# Altium PCB RCJ22_sensors_board_2_copy.PcbDoc
Units mm, origin at the board's own origin, x right, y up, seen from the top; angles counter-clockwise.
Board outline 70 x 42 mm, 2 copper layers (Top Layer, Bottom Layer), stack 1.071 mm thick; 44 components, 26 nets, 147 pads, 56 vias.
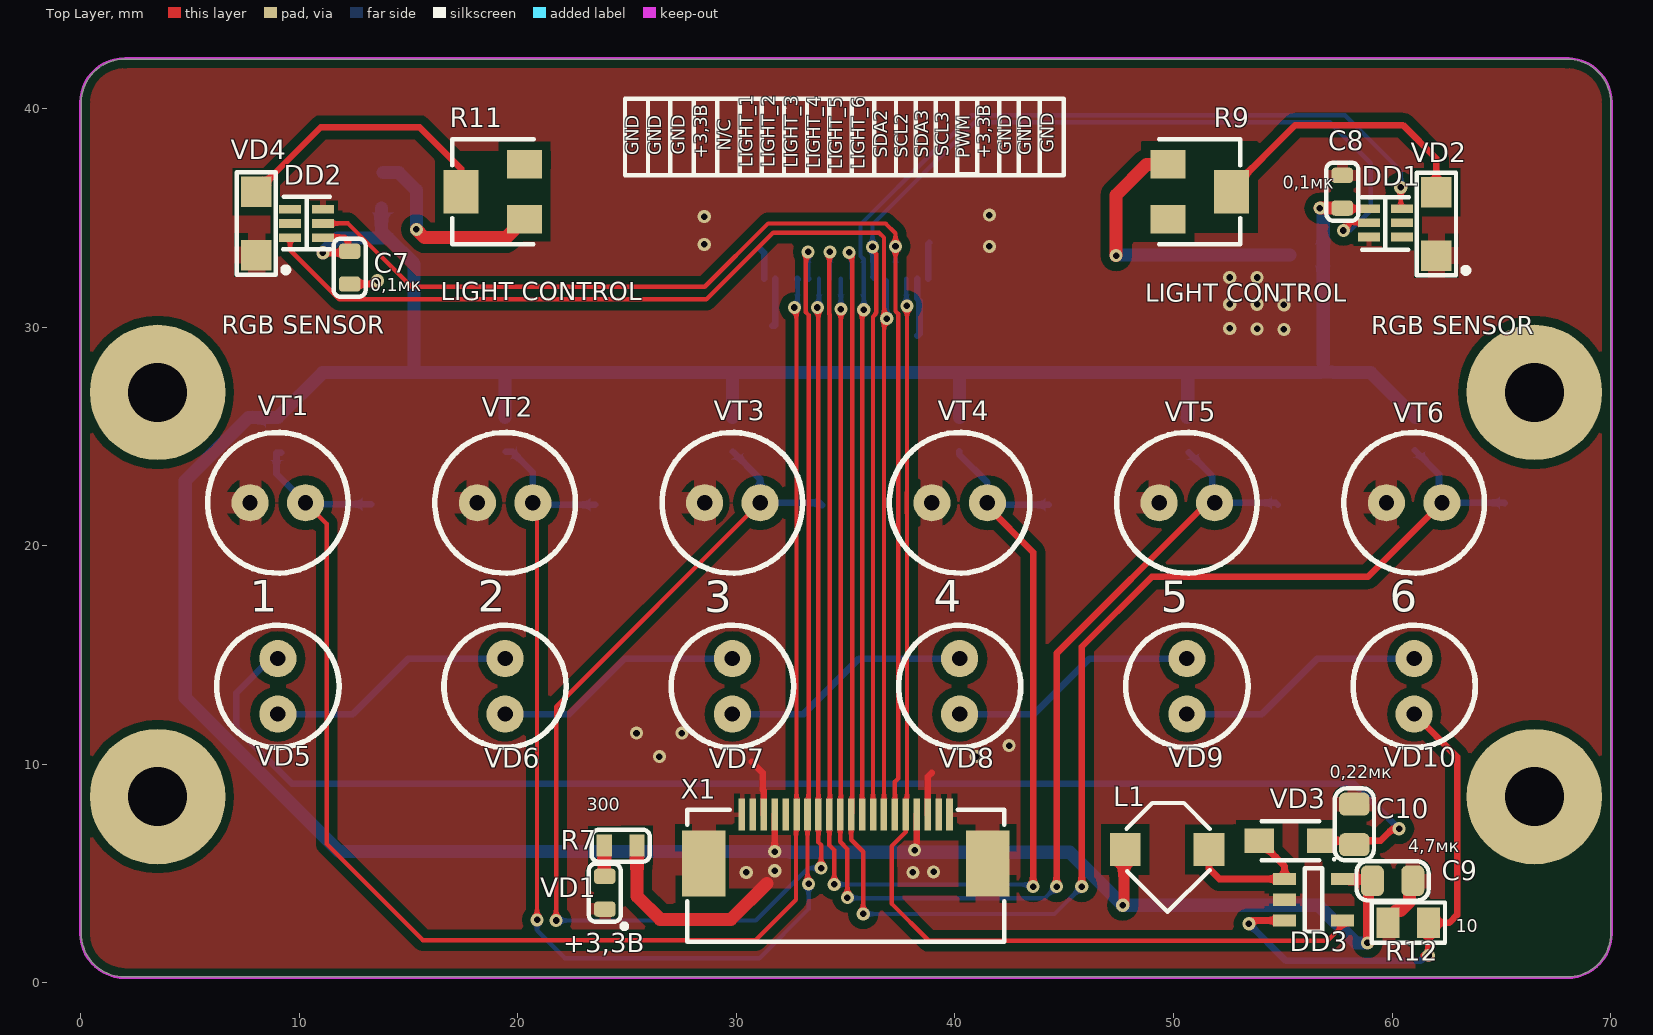
[diagram p0: Top Layer view]
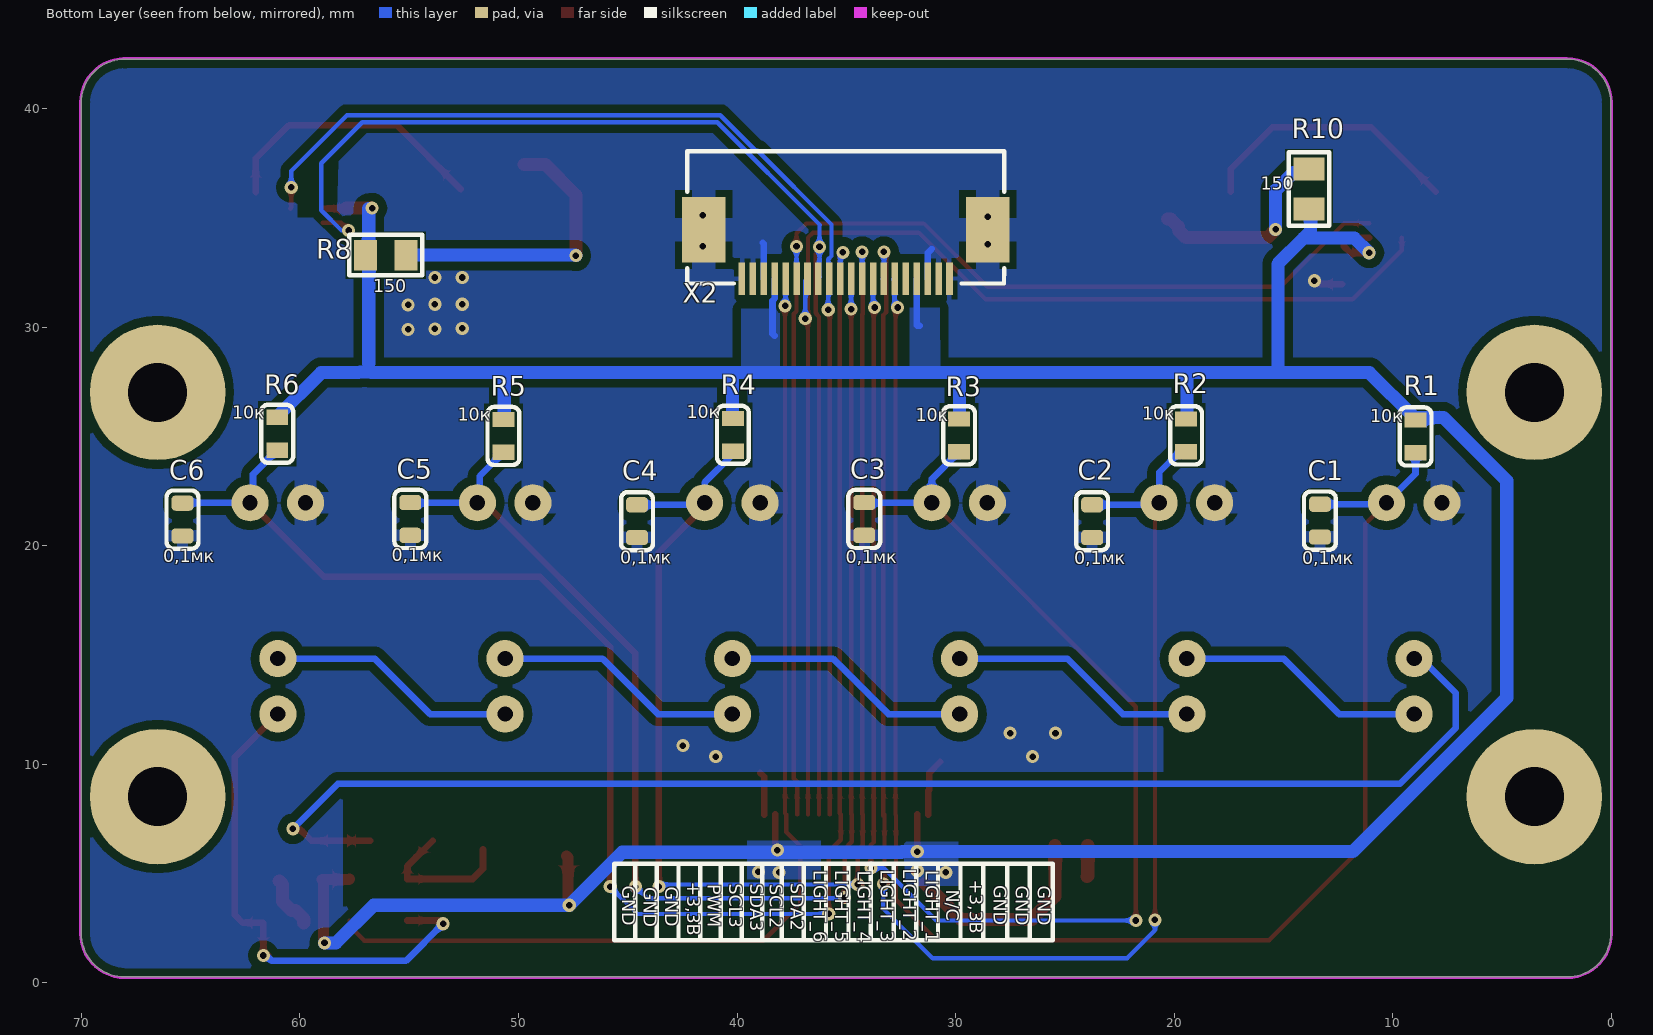
[diagram p1: Bottom Layer view, seen from below]
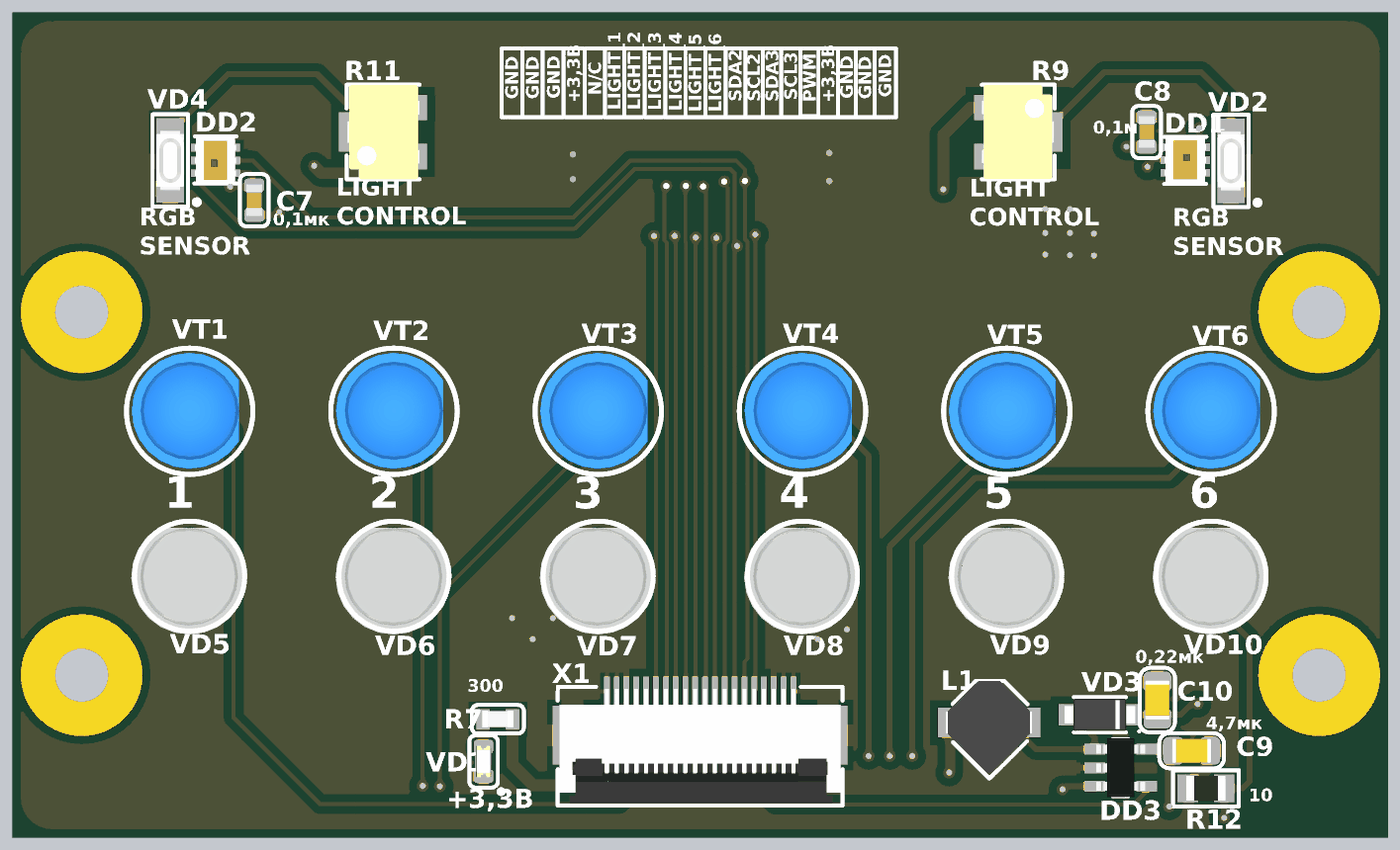
[diagram p2: 3D render of the assembled board from above, using the file's embedded part models]
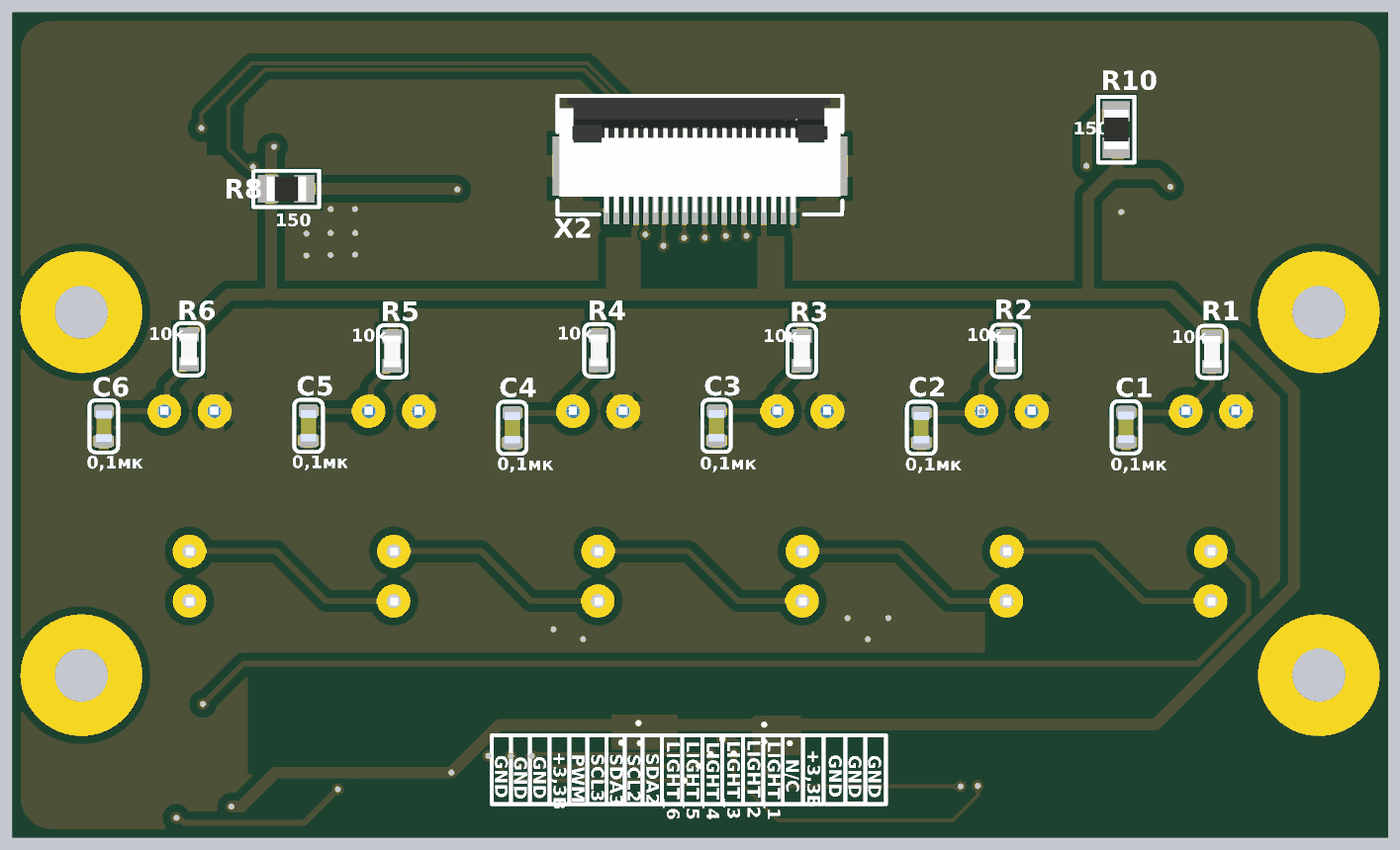
[diagram p3: 3D render of the assembled board from below, using the file's embedded part models]

## Layer stack, top to bottom
Top Solder: solder mask 0.0102, Solder Resist, Dk 3.5
Top Layer: signal copper 0.0356
Dielectric 1: dielectric 1, FR-4, Dk 4.8
Bottom Layer: signal copper 0.0356
Bottom Solder: solder mask 0.0102, Solder Resist, Dk 3.5

## Board outline
2.013,0.267 cw(c2.013,2.267) 0.013,2.267 0.013,40.267 0.012,40.267 cw(c2.013,40.267) 2.013,42.267 68.013,42.267 cw(c68.013,40.267) 70.013,40.267 70.013,2.267 cw(c68.013,2.267) 68.013,0.267

## Design rules (kind name [scope] priority, off if disabled: settings)
Clearance Clearance_GND_Poly [InNet('GND') AND InPolygon] p1: gap=0.4 ignorepadtopadclearanceinfootprint=FALSE
Clearance Clearance_2 [All] p2: gap=0.125 ignorepadtopadclearanceinfootprint=FALSE
Clearance Clearance_1 [IsPadHoleValid] p3: gap=0.2 ignorepadtopadclearanceinfootprint=FALSE
Clearance Clearance_Edge_Mid [((OnLayer('Signal Layer 1') OR OnLayer('Signal Layer 2')OR OnLayer('Signal Layer 3')OR OnLayer('Signal Layer 4'))) vs (OnLayer('Keep-Out Layer'))] p4: gap=0.25 ignorepadtopadclearanceinfootprint=FALSE
Clearance Clearance_Edge [All vs (OnLayer('Keep-Out Layer'))] p5: gap=0.25 ignorepadtopadclearanceinfootprint=FALSE
Clearance Via [IsVia vs IsVia] p6: gap=0.2 ignorepadtopadclearanceinfootprint=FALSE
Clearance Clearance_Poly_top [InPolygon AND (OnLayer('Top Layer') OR OnLayer('Bottom Layer'))] p7: gap=0.2 ignorepadtopadclearanceinfootprint=FALSE
Clearance Clearance_Poly_Mid [InPolygon AND (OnLayer('Signal Layer 1') OR OnLayer('Signal Layer 2') OR OnLayer('Signal Layer 3') OR OnLayer('Signal Layer 4'))] p8: gap=0.3 ignorepadtopadclearanceinfootprint=FALSE except(0.2: Via-Fill Via-Poly Via-Region)
ComponentClearance [All] p1: gap=0 collisioncheckmode=3 verticalgap=0 showdistances=FALSE
DiffPairsRouting [All] p1: maxlimit=0.254 minlimit=0.1 mostfreqgap=0.2 toplayer_minwidth=0.1 toplayer_maxwidth=0.381 toplayer_prefwidth=0.1 bottomlayer_minwidth=0.1 bottomlayer_maxwidth=0.381 bottomlayer_prefwidth=0.1 maxuncoupledlength=12.7
Height [All] p1: minheight=0 maxheight=30 prefheight=0
HoleSize [All] p1: absolutevalues=TRUE maxlimit=10 minlimit=0.2 maxpercent=80.000 minpercent=20.000
HoleToHoleClearance [All] p1: gap=0.2 allowstackedmicrovias=TRUE
MatchedLengths MatchedLengths_CSI2 [InDifferentialPairClass('MIPI_TX')] p1: tolerance=1 checknetsindiffpair=FALSE checkdiffpairvsdiffpair=TRUE checkxsignals=TRUE checkothers=TRUE
MatchedLengths MatchedLengths_CSI1 [InDifferentialPairClass('MIPI_CSI23')] p2: tolerance=1 checknetsindiffpair=FALSE checkdiffpairvsdiffpair=TRUE checkxsignals=TRUE checkothers=TRUE
MatchedLengths MatchedLengths_CSI0 [InDifferentialPairClass('MIPI_CSI0')] p3: tolerance=1 checknetsindiffpair=FALSE checkdiffpairvsdiffpair=TRUE checkxsignals=TRUE checkothers=TRUE
MatchedLengths [InDifferentialPairClass('All Differential Pairs')] p4: tolerance=0.5 checknetsindiffpair=TRUE checkdiffpairvsdiffpair=FALSE checkxsignals=FALSE checkothers=FALSE
MinimumSolderMaskSliver [All] p1: minsoldermaskwidth=0.05
PlaneClearance [All] p1: clearance=0.5
PlaneConnect [All] p1: planeconnectstyle=Relief reliefexpansion=0.5 reliefentries=4 reliefconductorwidth=0.2 reliefairgap=0.2
PolygonConnect PolygonConnect_<=0.3 [(AsMM(PadXSize_AllLayers)<=0.301) or (AsMM(PadYSize_AllLayers)<=0.301)] p1: thpad.connectstyle=Relief thpad.reliefconductorwidth=0.2 thpad.reliefentries=4 thpad.polygonreliefangle="90 Angle" thpad.airgapwidth=0.2 smdpad.connectstyle=Relief smdpad.reliefconductorwidth=0.2 smdpad.reliefentries=4 smdpad.polygonreliefangle="90 Angle" smdpad.airgapwidth=0.2 via.connectstyle=Direct via.reliefconductorwidth=0.2 via.reliefentries=4 via.polygonreliefangle="90 Angle" via.airgapwidth=0.2
PolygonConnect PolygonConnect_<=0.4 [(AsMM(PadXSize_AllLayers)<=0.401) or (AsMM(PadYSize_AllLayers)<=0.401)] p2: thpad.connectstyle=Relief thpad.reliefconductorwidth=0.26 thpad.reliefentries=4 thpad.polygonreliefangle="90 Angle" thpad.airgapwidth=0.2 smdpad.connectstyle=Relief smdpad.reliefconductorwidth=0.26 smdpad.reliefentries=4 smdpad.polygonreliefangle="90 Angle" smdpad.airgapwidth=0.2 via.connectstyle=Direct via.reliefconductorwidth=0.26 via.reliefentries=4 via.polygonreliefangle="90 Angle" via.airgapwidth=0.2
PolygonConnect PolygonConnect_<=0.6 [(AsMM(PadXSize_AllLayers)<=0.601) or (AsMM(PadYSize_AllLayers)<=0.601)] p3: thpad.connectstyle=Relief thpad.reliefconductorwidth=0.33 thpad.reliefentries=4 thpad.polygonreliefangle="90 Angle" thpad.airgapwidth=0.2 smdpad.connectstyle=Relief smdpad.reliefconductorwidth=0.33 smdpad.reliefentries=4 smdpad.polygonreliefangle="90 Angle" smdpad.airgapwidth=0.2 via.connectstyle=Direct via.reliefconductorwidth=0.33 via.reliefentries=4 via.polygonreliefangle="90 Angle" via.airgapwidth=0.2
PolygonConnect PolygonConnect_<=0.8 [(AsMM(PadXSize_AllLayers)<=0.8)or(AsMM(PadYSize_AllLayers)<=0.8)] p4: thpad.connectstyle=Relief thpad.reliefconductorwidth=0.53 thpad.reliefentries=4 thpad.polygonreliefangle="90 Angle" thpad.airgapwidth=0.3 smdpad.connectstyle=Relief smdpad.reliefconductorwidth=0.53 smdpad.reliefentries=4 smdpad.polygonreliefangle="90 Angle" smdpad.airgapwidth=0.3 via.connectstyle=Direct via.reliefconductorwidth=0.53 via.reliefentries=4 via.polygonreliefangle="90 Angle" via.airgapwidth=0.3
PolygonConnect PolygonConnect_<=1 [(AsMM(PadXSize_AllLayers)<=1.01)or(AsMM(PadYSize_AllLayers)<=1.01)] p5: thpad.connectstyle=Relief thpad.reliefconductorwidth=0.6 thpad.reliefentries=4 thpad.polygonreliefangle="90 Angle" thpad.airgapwidth=0.3 smdpad.connectstyle=Relief smdpad.reliefconductorwidth=0.6 smdpad.reliefentries=4 smdpad.polygonreliefangle="90 Angle" smdpad.airgapwidth=0.3 via.connectstyle=Direct via.reliefconductorwidth=0.6 via.reliefentries=4 via.polygonreliefangle="90 Angle" via.airgapwidth=0.3
PolygonConnect PolygonConnect_<=1.3 [(AsMM(PadXSize_AllLayers)<=1.31)or(AsMM(PadYSize_AllLayers)<=1.31)] p6: thpad.connectstyle=Relief thpad.reliefconductorwidth=0.66 thpad.reliefentries=4 thpad.polygonreliefangle="90 Angle" thpad.airgapwidth=0.3 smdpad.connectstyle=Relief smdpad.reliefconductorwidth=0.66 smdpad.reliefentries=4 smdpad.polygonreliefangle="90 Angle" smdpad.airgapwidth=0.3 via.connectstyle=Direct via.reliefconductorwidth=0.66 via.reliefentries=4 via.polygonreliefangle="90 Angle" via.airgapwidth=0.3
PolygonConnect PolygonConnect_<=1.6 [(AsMM(PadXSize_AllLayers)<=1.61)or(AsMM(PadYSize_AllLayers)<=1.61)] p7: thpad.connectstyle=Relief thpad.reliefconductorwidth=0.8 thpad.reliefentries=4 thpad.polygonreliefangle="90 Angle" thpad.airgapwidth=0.3 smdpad.connectstyle=Relief smdpad.reliefconductorwidth=0.8 smdpad.reliefentries=4 smdpad.polygonreliefangle="90 Angle" smdpad.airgapwidth=0.3 via.connectstyle=Direct via.reliefconductorwidth=0.8 via.reliefentries=4 via.polygonreliefangle="90 Angle" via.airgapwidth=0.3
PolygonConnect PolygonConnect_<=1.8 [(AsMM(PadXSize_AllLayers)<=1.8)or(AsMM(PadYSize_AllLayers)<=1.8)] p8: thpad.connectstyle=Relief thpad.reliefconductorwidth=1 thpad.reliefentries=4 thpad.polygonreliefangle="90 Angle" thpad.airgapwidth=0.3 smdpad.connectstyle=Relief smdpad.reliefconductorwidth=1 smdpad.reliefentries=4 smdpad.polygonreliefangle="90 Angle" smdpad.airgapwidth=0.3 via.connectstyle=Direct via.reliefconductorwidth=1 via.reliefentries=4 via.polygonreliefangle="90 Angle" via.airgapwidth=0.3
PolygonConnect PolygonConnect_<=2 [(AsMM(PadXSize_AllLayers)<=2.01)or(AsMM(PadYSize_AllLayers)<=2.01)] p9: thpad.connectstyle=Relief thpad.reliefconductorwidth=1.1 thpad.reliefentries=4 thpad.polygonreliefangle="90 Angle" thpad.airgapwidth=0.3 smdpad.connectstyle=Relief smdpad.reliefconductorwidth=1.1 smdpad.reliefentries=4 smdpad.polygonreliefangle="90 Angle" smdpad.airgapwidth=0.3 via.connectstyle=Direct via.reliefconductorwidth=1.1 via.reliefentries=4 via.polygonreliefangle="90 Angle" via.airgapwidth=0.3
PolygonConnect PolygonConnect_<=2.3 [(AsMM(PadXSize_AllLayers)<=2.31)or(AsMM(PadYSize_AllLayers)<=2.31)] p10: thpad.connectstyle=Relief thpad.reliefconductorwidth=1.2 thpad.reliefentries=4 thpad.polygonreliefangle="90 Angle" thpad.airgapwidth=0.3 smdpad.connectstyle=Relief smdpad.reliefconductorwidth=1.2 smdpad.reliefentries=4 smdpad.polygonreliefangle="90 Angle" smdpad.airgapwidth=0.3 via.connectstyle=Direct via.reliefconductorwidth=1.2 via.reliefentries=4 via.polygonreliefangle="90 Angle" via.airgapwidth=0.3
PolygonConnect PolygonConnect_<=2.5 [(AsMM(PadXSize_AllLayers)<=2.51)or(AsMM(PadYSize_AllLayers)<=2.51)] p11: thpad.connectstyle=Relief thpad.reliefconductorwidth=1.2 thpad.reliefentries=4 thpad.polygonreliefangle="90 Angle" thpad.airgapwidth=0.3 smdpad.connectstyle=Relief smdpad.reliefconductorwidth=1.2 smdpad.reliefentries=4 smdpad.polygonreliefangle="90 Angle" smdpad.airgapwidth=0.3 via.connectstyle=Direct via.reliefconductorwidth=1.2 via.reliefentries=4 via.polygonreliefangle="90 Angle" via.airgapwidth=0.3
PolygonConnect PolygonConnect_<=2.7 [(AsMM(PadXSize_AllLayers)<=2.71)or(AsMM(PadYSize_AllLayers)<=2.71)] p12: thpad.connectstyle=Relief thpad.reliefconductorwidth=1.4 thpad.reliefentries=4 thpad.polygonreliefangle="90 Angle" thpad.airgapwidth=0.3 smdpad.connectstyle=Relief smdpad.reliefconductorwidth=1.4 smdpad.reliefentries=4 smdpad.polygonreliefangle="90 Angle" smdpad.airgapwidth=0.3 via.connectstyle=Direct via.reliefconductorwidth=1.4 via.reliefentries=4 via.polygonreliefangle="90 Angle" via.airgapwidth=0.3
PolygonConnect PolygonConnect_<=3 [(AsMM(PadXSize_AllLayers)<=3.01)or(AsMM(PadYSize_AllLayers)<=3.01)] p13: thpad.connectstyle=Relief thpad.reliefconductorwidth=1.6 thpad.reliefentries=4 thpad.polygonreliefangle="90 Angle" thpad.airgapwidth=0.3 smdpad.connectstyle=Relief smdpad.reliefconductorwidth=1.6 smdpad.reliefentries=4 smdpad.polygonreliefangle="90 Angle" smdpad.airgapwidth=0.3 via.connectstyle=Direct via.reliefconductorwidth=1.6 via.reliefentries=4 via.polygonreliefangle="90 Angle" via.airgapwidth=0.3
PolygonConnect PolygonConnect_<7 [(AsMM(PadXSize_AllLayers)<7.01)or(AsMM(PadYSize_AllLayers)<=7.01)] p14: thpad.connectstyle=Relief thpad.reliefconductorwidth=2 thpad.reliefentries=4 thpad.polygonreliefangle="90 Angle" thpad.airgapwidth=0.35 smdpad.connectstyle=Relief smdpad.reliefconductorwidth=2 smdpad.reliefentries=4 smdpad.polygonreliefangle="90 Angle" smdpad.airgapwidth=0.35 via.connectstyle=Direct via.reliefconductorwidth=2 via.reliefentries=4 via.polygonreliefangle="90 Angle" via.airgapwidth=0.4
PolygonConnect [All] p15: thpad.connectstyle=Relief thpad.reliefconductorwidth=0.25 thpad.reliefentries=4 thpad.polygonreliefangle="90 Angle" thpad.airgapwidth=0.2 smdpad.connectstyle=Relief smdpad.reliefconductorwidth=0.25 smdpad.reliefentries=4 smdpad.polygonreliefangle="90 Angle" smdpad.airgapwidth=0.2 via.connectstyle=Direct via.reliefconductorwidth=0.25 via.reliefentries=4 via.polygonreliefangle="90 Angle" via.airgapwidth=0.2
RoutingCorners [All] p1: cornerstyle=45-Degree minsetback=2.5 maxsetback=2.5
RoutingVias [All] p1: holewidth=0.2 width=0.4 viastyle="Through Hole" minholewidth=0.2 minwidth=0.4 maxholewidth=3 maxwidth=4
ShortCircuit ShortCircuit_NoNet [InNet('No Net') vs InNet('No Net')] p1: allowed=TRUE
ShortCircuit ShortCircuit_GND [InNetClass('GND') vs InNetClass('GND')] p2: allowed=TRUE
ShortCircuit [All] p3: allowed=FALSE
SilkToSilkClearance [All] p1: silktosilkclearance=0
SilkToSolderMaskClearance SilkscreenOverComponentPads [IsPad] p1: minsilkscreentomaskgap=0 clearancetoexposedcopper=TRUE
SolderMaskExpansion SolderMaskExpansion_Via [IsVia] p1: expansion=0 istentingtop=FALSE
SolderMaskExpansion [All] p2: expansion=0.025 istentingtop=FALSE
UnConnectedPin [IsVia] p1:
Width [All] p1: maxlimit=3 minlimit=0.1 preferedwidth=0.1 minimp=50.000000 maximp=50.000000 favimp=50.000000
18 further rules are at their usual default settings.

## Components (designator, comment, footprint, x,y, rotation, side; value= is the part's Value field where it differs from the comment)
C1 "0,1мк" C0603_A 13.325,21.15 r90 bottom
C2 "0,1мк" C0603_A 23.75,21.125 r90 bottom
C3 "0,1мк" C0603_A 34.175,21.225 r90 bottom
C4 "0,1мк" C0603_A 44.575,21.125 r90 bottom
C5 "0,1мк" C0603_A 54.95,21.225 r90 bottom
C6 "0,1мк" C0603_A 65.375,21.2 r90 bottom
C7 "0,1мк" C0603_A 12.3,32.725 r90 top
C8 "0,1мк" C0603_A 57.725,36.2 r270 top
C9 "4,7мк" C0805 60.025,4.665 r180 top
C10 "0,22мк" C0805 58.275,7.25 r270 top
DD1 "TCS34725" TCS34725 58.95,35.425 r0 top
DD2 "TCS34725" TCS34725 11.075,34.1 r180 top
DD3 "CAT4237" SOT-23_5 56.408,3.8 r0 top
L1 "CDRH3D16NP" CDRH3D16NP-330NC 51.6,6.1 r270 top value="33 мкГн"
R1 "10к" R0603 8.95,25 r90 bottom
R2 "10к" R0603 19.45,25.05 r90 bottom
R3 "10к" R0603 29.838,25.05 r90 bottom
R4 "10к" R0603 40.188,25.075 r90 bottom
R5 "10к" R0603 50.688,25.025 r90 bottom
R6 "10к" R0603 61.038,25.125 r90 bottom
R7 "300" R0603 24.7,6.275 r180 top
R8 "150" R0805 56.075,33.3 r180 bottom
R9 "1к" PVG5 52.65,36.2 r270 top
R10 "150" R0805 13.825,36.325 r90 bottom
R11 "1к" PVG5 17.4,36.2 r90 top
R12 "10" R0805 60.75,2.75 r0 top
VD1 "YELLOW" LED0603_YELLOW 23.975,4.121 r90 top
VD2 "LK2C-B38452" PLCC-2 62.025,34.725 r90 top
VD3 "MBR2H100SFT3G" SODFL_498 55.35,6.5 r180 top
VD4 "LK2C-B38452" PLCC-2 8.025,34.75 r90 top
VD5 "L-34F3C" LED_5mm 9.013,13.567 r90 top
VD6 "L-34F3C" LED_5mm 19.413,13.567 r90 top
VD7 "L-34F3C" LED_5mm 29.813,13.567 r90 top
VD8 "L-34F3C" LED_5mm 40.213,13.567 r90 top
VD9 "L-34F3C" LED_5mm 50.613,13.567 r90 top
VD10 "L-34F3C" LED_5mm 61.013,13.567 r90 top
VT1 "L-7113P3C" L-7113P3C 9.013,21.967 r0 top
VT2 "L-7113P3C" L-7113P3C 19.413,21.967 r0 top
VT3 "L-7113P3C" L-7113P3C 29.813,21.967 r0 top
VT4 "L-7113P3C" L-7113P3C 40.213,21.967 r0 top
VT5 "L-7113P3C" L-7113P3C 50.613,21.967 r0 top
VT6 "L-7113P3C" L-7113P3C 61.013,21.967 r0 top
X1 "FPC-20" FPC_14 35,7.7 r0 top
X2 "FPC-20" FPC_14 35.025,32.225 r0 bottom

## Footprints (in the part's own frame and the unit in brackets; to place one, negate y for a bottom-side part, rotate by r counter-clockwise, add the part's x,y. Pads: shape width x height; smd on the part's side, far side on the other; paste and mask are expansions set on the pad)
C0603_A [mm]
  rrect50% 0.7x1 smd: 1(-0.75,0) 2(0.75,0)
  Top Layer pour cut-out: -0.4,0.5 0.4,0.5 0.4,-0.5 -0.4,-0.5
  silkscreen extent -1.33,-0.73 1.33,0.73, body extent -0.8,-0.4 0.8,0.4, height 0.9
C0805 [mm]
  rrect50% 1.05x1.4 smd: 1(-0.925,0) 2(0.925,0)
  silkscreen extent -1.65,-0.9 1.65,0.9, body extent -1,-0.62 1,0.63, height 0.6
CDRH3D16NP-330NC [mm]
  rect 1.5x1.4 smd: 1(0,0.025) 2(0,-3.8)
  silkscreen extent -2.12,-3.75 2.85,0.06, body extent -2.75,-4.65 2.75,0.85, height 1.8
FPC_14 [mm]
  rect 2x3 smd: 0(-6.5,-2.24) 0(6.5,-2.24)
  rect 0.3x1.48 smd: 1(-4.75,0) 2(-4.25,0) 3(-3.75,0) 4(-3.25,0) 5(-2.75,0) 6(-2.25,0) 7(-1.75,0) 8(-1.25,0) 9(-0.75,0) 10(-0.25,0) 11(0.25,0) 12(0.75,0) 13(1.25,0) 14(1.75,0) 15(2.25,0) 16(2.75,0) 17(3.25,0) 18(3.75,0) 19(4.25,0) 20(4.75,0)
  silkscreen extent -7.26,-5.82 7.25,0.23, body extent -7.15,-5.72 7.15,0.13, height 2.11
L-7113P3C [mm]
  round 1.7 hole 0.7: 1(-1.27,0) 2(1.27,0)
  silkscreen extent -3.21,-3.22 3.22,3.22, body extent -2.95,-2.92 2.5,2.98, height 8.83
LED0603_YELLOW [mm]
  rrect50% 0.7x1 smd: 1(-0.75,0) 2(0.75,0)
  Top Layer pour cut-out: -0.4,0.5 0.4,0.5 0.4,-0.5 -0.4,-0.5
  silkscreen extent -1.63,-0.99 1.33,0.73, body extent -0.81,-0.4 0.81,0.4, height 0.6
LED_5mm [mm]
  round 1.7 hole 0.7: 1(-1.27,0) 2(1.27,0)
  silkscreen extent -2.8,-2.8 2.8,2.8, body extent -2.97,-2.92 2.48,2.98, height 8.83
PLCC-2 [mm]
  rect 1.4x1.4 smd: 1(-1.45,0) 2(1.45,0)
  silkscreen extent -2.35,-1.48 2.35,0.9, body extent -1.55,-0.7 1.55,0.7, height 1.2
PVG5 [mm]
  rect 1.3x1.6 smd: 1(-1.25,-2.9) 3(1.25,-2.9)
  rect 2x1.6 smd: 2(0,0)
  silkscreen extent -2.41,-3.31 2.41,0.4, body extent -2.4,-3.32 2.39,0.37, height 5.6
R0603 [mm]
  rect 0.7x1 smd: 1(-0.75,0) 2(0.75,0)
  Top Layer pour cut-out: -0.4,0.5 0.4,0.5 0.4,-0.5 -0.4,-0.5
  silkscreen extent -1.33,-0.73 1.33,0.73, body extent -0.8,-0.43 0.8,0.43, height 0.48
R0805 [mm]
  rect 1.05x1.4 smd: 1(-0.925,0) 2(0.925,0)
  silkscreen extent -1.68,-0.92 1.68,0.92, body extent -1,-0.62 1,0.63, height 0.6
SODFL_498 [mm] "SODFL, 2-Leads, Body 1,65x3,60mm, IPC Medium Density"
  rect 1.35x1.1 smd: 1(-1.425,0) 2(1.425,0)
  silkscreen extent -2.05,-0.9 1.33,0.9, body extent -1.8,-0.82 1.8,0.82, height 0.95
SOT-23_5 [mm] "SOT23, 5-Leads, Body 2,90x2,80mm, Pitch 0,95mm, IPC Medium Density"
  rect 1.05x0.55 smd: 1(-1.325,0.95) 2(-1.325,0) 3(-1.325,-0.95) 4(1.325,-0.95) 5(1.325,0.95)
  silkscreen extent -0.4,-1.45 0.4,1.45, body extent -1.25,-1.5 1.25,1.5, height 1.05
TCS34725 [mm]
  rect 1x0.4 smd: 1(0,0) 2(0,-0.65) 3(0,-1.3) 4(1.5,-1.3) 5(1.5,-0.65) 6(1.5,0)
  silkscreen extent -0.33,-1.87 1.83,0.53, body extent -0.3,-1.85 1.8,0.55, height 0.67

## Part data
C1 C2 C3 C4 C5 C6 C7 C8 C9 C10: library part Конденсатор, Value2=50В
  C1 C2 C3 C4 C5 C6 C7 C8: Value1=0,1мк
  C9: Value1=4,7мк
  C10: Value1=0,22мк
DD1 DD2: "Датчик цвета RGB"
DD3: "Драйвер светодиодов"
L1: library part "Катушка индуктивности", Name=CDRH3D16NP
R1 R2 R3 R4 R5 R6 R12: library part "Резистор 0.05 Вт"
R7 R8 R10: library part "Резистор 0.125 Вт"
R9 R11: library part "Резистор переменный"
VD1 VD2 VD4: library part Светодиод
  VD1: Color=YELLOW
  VD2 VD4: Color=LK2C-B38452
VD3: library part "Диод Шоттки", Name=MBR2H100SFT3G
VD5 VD6 VD7 VD8 VD9 VD10: library part Светодиод_2, Color=L-34F3C
VT1 VT2 VT3 VT4 VT5 VT6: library part "PNP Фототранзистор", Name=L-7113P3C
X1 X2: library part "Разъем 24", "20 розетка", Contact_1=GND, Contact_2=GND, Contact_3=GND, Contact_4=+3,3В, Contact_5=N/C, Contact_6=LIGHT_SENSOR1, Contact_7=LIGHT_SENSOR2, Contact_8=LIGHT_SENSOR3, Contact_9=LIGHT_SENSOR4, Contact_10=LIGHT_SENSOR5, Contact_11=LIGHT_SENSOR6, Contact_12=I2C2_SDA, Contact_13=I2C2_SCL, Contact_14=I2C3_SDA, Contact_15=I2C3_SCL, Contact_16=PWM_LIGHT, Contact_17=+3,3В, Contact_18=GND, Contact_19=GND, Contact_20=GND, Name=FPC-20

## Free pads (board coordinates)
  round 0.3 smd far side: EndPad(20.683,21.967) StartPad(19.45,24.3)
  round 6.2 hole 2.7: ""(3.513,8.517) ""(3.513,27.017) ""(66.513,8.517) ""(66.513,27.017)

## Via types
v1: diameter 0.6, hole 0.3, Top Layer to Bottom Layer, tented both sides, 56 vias

## Nets (pads, with @x,y where several pads share a name; then routed paths per layer and width w, separated by ;. In a path a pad name is that pad's centre, name@x,y a point inside that pad or via, vN(x,y) a via of type N, cw(c..) or ccw(c..) an arc to the next point about the centre after c; other vN are vias at no path point)
+3,3В: C7.2 C8.2 C9.2 DD1.1 DD2.1 DD3.5 L1.2 R1.2 R2.2 R3.2 R4.2 R5.2 R6.2 R7.1 R8.1 R10.1 X1.4 X1.17 X2.4 X2.17 | length 183.5
  Top Layer w0.3: v1@11.075,33.55 v1(11.075,33.408) 11.933,33.408 12.225,33.7 12.225,33.925 12.05,34.1 DD2.1 ; v1(31.75,6) X1.4 ; 38.25,6.4 X1.17 ; C8.2@57.925,35.425 DD1.1
  Top Layer w0.5: v1@47.728,3.575 47.728,5.728 L1.2@47.8,5.8 ; DD3.5 57.758,4.725 59,4.725 58.925,4.65 v1@58.925,1.825
  Top Layer w0.6: R7.1 25.45,3.959 26.509,2.9 29.75,2.9 31.4,4.55 ; v1(56.7,35.45) C8.2 57.9,35.45 C8.2@57.925,35.425
  Bottom Layer w0.3: 31.65,30.075 31.75,30.075 31.775,30.1 X2.4 ; 38.275,29.6 38.377,29.702 38.377,31.215 38.275,31.317 X2.17
  Bottom Layer w0.6: v1(11.075,33.408) 11.742,34.075 12.05,34.075 14.075,34.075 ; R10.1@13.75,35.45 13.75,34.4 14.075,34.075 ; R2.2@19.413,25.875 19.413,27.925 ; R3.2@29.813,25.875 29.813,27.925 ; R4.2@40.213,25.875 40.213,27.887 40.175,27.925 ; R5.2@50.625,25.875 50.65,25.9 50.65,27.925 ; 56.85,28.35 v1@56.85,35.425 ; 57.25,27.95 56.925,27.95 56.85,28.025 56.75,27.925 50.65,27.925 ; 57.325,27.925 59.025,27.925 R6.2@61.075,25.875 ; v1(58.878,1.825) 58.35,1.825 56.625,3.55 v1(47.675,3.55) 45.25,5.975 32.475,5.975 32.45,6 v1(31.75,6) 11.82,6 4.775,13.045 4.775,22.975 7.675,25.875 9.013,25.875 11.063,27.925 15.25,27.925 ; 14.075,34.075 15.25,32.9 15.25,27.925 ; 15.25,27.925 19.413,27.925 ; 19.413,27.925 29.813,27.925 ; 29.813,27.925 40.175,27.925 ; 40.175,27.925 50.65,27.925
  other v1: 30.45,5.05 38.075,5.05 39.025,5.075 31.75,5.125 38.15,6.075
GND: C1.1 C2.1 C3.1 C4.1 C5.1 C6.1 C7.1 C8.1 C9.1 C10.1 DD1.3 DD2.3 DD3.2 R12.1 VD1.1 VD2.1 VD4.1 VT1.1 VT2.1 VT3.1 VT4.1 VT5.1 VT6.1 X1.0 X1.1 X1.2 X1.3 X1.18 X1.19 X1.20 X2.0 X2.1 X2.2 X2.3 X2.18 X2.19 X2.20 | length 11.6
  Top Layer w0.3: C7.1 13.425,31.975 v1(13.575,32.125) ; 30.704,10.11 31.198,9.617 31.198,8.842 31.25,8.79 X1.3 ; X1.18 38.75,9.424 38.943,9.617
  Top Layer w0.6: R12.1 59.825,2.925 60.2,3.3 60.375,3.3 60.791,3.716 60.791,4.506 C9.1
  Bottom Layer w0.3: 31.083,33.591 31.275,33.398 X2.3 ; X2.18 38.775,33.814 38.825,33.864
  other v1: 26.475,10.35 40.975,10.35 42.475,10.85 25.425,11.425 27.505,11.425 55.05,29.9 53.825,29.925 52.575,29.95 55.05,31.025 52.575,31.05 53.825,31.05 52.575,32.275 53.825,32.275 41.574,33.702 28.525,33.791 28.525,35.062 41.574,35.131
I2C2_SCL: DD1.2 X1.13 X2.13 | length 59.3
  Top Layer w0.2: v1(36.225,33.675) 36.225,33.525 36.4,33.35 36.4,30.658 36.352,30.609 36.352,30.584 36.25,30.482 X1.13 ; v1(57.775,34.425) 58.125,34.775 DD1.2
  Bottom Layer w0.2: X2.13 36.202,32.298 36.225,32.321 v1(36.225,33.675) 36.225,34.654 36.202,34.677 40.9,39.375 57.15,39.375 59.025,37.5 59.025,35.35 58.1,34.425 v1(57.775,34.425)
I2C2_SDA: DD1.6 X1.12 X2.12 | length 56.7
  Top Layer w0.2: X1.12 35.75,30.725 v1(35.827,30.802) ; v1(60.4,36.4) 60.4,35.475 DD1.6
  Bottom Layer w0.2: v1(35.827,30.802) 35.827,33.109 35.677,33.259 35.677,34.702 39.05,38.075 39.14,38.075 40.765,39.7 57.85,39.7 60.4,37.15 v1(60.4,36.4)
I2C3_SCL: DD2.2 X1.15 X2.15 | length 57
  Top Layer w0.2: DD2.2 12.225,34.75 15.125,31.85 28.55,31.85 31.448,34.748 36.825,34.748 37.277,34.296 v1(37.277,33.702) 37.277,30.738 37.275,30.736 37.402,30.609 37.402,9.35 37.25,9.198 X1.15
  Bottom Layer w0.2: X2.15 37.277,32.227 v1(37.277,33.702)
I2C3_SDA: DD2.6 X1.14 X2.14 | length 58.4
  Top Layer w0.2: DD2.6 9.575,33.525 11.825,31.275 28.625,31.275 31.675,34.325 36.525,34.325 36.75,34.1 36.75,30.519 v1(36.877,30.392) 36.75,30.265 X1.14
  Bottom Layer w0.2: X2.14 36.877,32.123 v1(36.877,30.392)
LIGHT_SENSOR1: C1.2 R1.1 VT1.2 X1.6 X2.6 | length 74.7
  Top Layer w0.2: VT1.2 11.25,20.999 11.25,6.35 15.65,1.95 30.875,1.95 32.725,3.8 X1.6@32.725,7.675 ; v1(32.652,30.902) 32.702,30.902 32.75,30.853 X1.6
  Bottom Layer w0.2: v1@32.8,31 X2.6@32.8,32.2
  Bottom Layer w0.3: R1.1@9.175,24.25 R1.1 8.95,23.299 VT1.2 10.349,21.9 C1.2@13.275,21.9 ; v1(32.652,30.902) 32.702,30.902 v1@32.8,31 ; X2.6 X2.6@32.8,32.2
LIGHT_SENSOR2: C2.2 pad.EndPad pad.StartPad R2.1 VT2.2 X1.7 X2.7 | length 70.8
  Top Layer w0.2: v1@20.875,3.1 VT2.2@20.875,21.774 ; v1(33.277,33.45) 33.177,33.35 33.177,30.684 33.3,30.561 33.3,7.65 X1.7 33.25,4.575 v1(33.3,4.525)
  Top Layer w0.3: VT2.2 VT2.2@20.875,21.774
  Bottom Layer w0.2: v1(20.875,2.875) 20.875,2.4 22.15,1.125 31.05,1.125 33.3,3.375 v1(33.3,4.525) ; v1(33.277,33.45) 33.277,32.223 X2.7@33.3,32.2
  Bottom Layer w0.3: R2.1 19.75,24.3 20.683,23.367 VT2.2 20.774,21.875 C2.2@23.525,21.875 ; X2.7 X2.7@33.277,32.223
LIGHT_SENSOR3: C3.2 R3.1 VT3.2 X1.8 X2.8 | length 68.9
  Top Layer w0.2: v1(21.75,2.85) 21.75,12.634 VT3.2 ; v1(33.702,30.902) 33.75,30.853 X1.8 33.75,6.425 33.875,6.3 v1(33.875,5.25)
  Bottom Layer w0.2: v1(21.75,2.85) 30.883,2.85 33.283,5.25 v1(33.875,5.25) ; v1(33.702,30.902) 33.775,30.975 X2.8
  Bottom Layer w0.3: R3.1 31.083,23.055 VT3.2 33.808,21.967 C3.2@33.925,21.85
LIGHT_SENSOR4: C4.2 R4.1 VT4.2 X1.9 X2.9 | length 63.6
  Top Layer w0.2: v1(34.275,33.45) 34.25,33.425 34.25,30.608 34.275,30.583 34.275,7.725 X1.9 34.25,6.3 34.475,6.075 v1(34.475,4.5)
  Top Layer w0.3: VT4.2 41.483,21.792 43.575,19.7 v1(43.575,4.4)
  Bottom Layer w0.2: X2.9 v1(34.275,33.45) ; v1(34.475,4.5) 43.475,4.5 v1(43.575,4.4)
  Bottom Layer w0.3: R4.1 40.188,24.187 41.483,22.892 VT4.2 41.574,21.875 C4.2@44.3,21.875
LIGHT_SENSOR5: C5.2 R5.1 VT5.2 X1.10 X2.10 | length 64.8
  Top Layer w0.2: v1(34.775,30.825) 34.775,7.725 X1.10 34.75,6.45 35.075,6.125 v1(35.075,3.9)
  Top Layer w0.3: v1(44.65,4.4) 44.65,15.075 51.542,21.967 VT5.2
  Bottom Layer w0.2: v1(34.775,30.825) X2.10 ; v1(35.075,3.9) 35.1,3.875 44.125,3.875 v1(44.65,4.4)
  Bottom Layer w0.3: R5.1 51.775,23.188 51.775,22.074 VT5.2 54.684,21.967 C5.2@54.775,21.875
LIGHT_SENSOR6: C6.2 R6.1 VT6.2 X1.11 X2.11 | length 78.3
  Top Layer w0.2: v1(35.152,33.427) 35.273,33.427 35.3,33.4 35.3,7.75 X1.11 35.25,6.55 35.8,6 v1(35.8,3.15)
  Top Layer w0.3: v1@45.8,4.475 45.8,15.375 49,18.575 58.891,18.575 VT6.2
  Bottom Layer w0.2: v1(35.152,33.427) 35.275,33.303 X2.11 ; v1(35.8,3.15) 44.55,3.15 v1(45.8,4.4)
  Bottom Layer w0.3: R6.1 62.15,23.263 62.15,22.099 VT6.2 65.133,21.967 C6.2@65.15,21.95
NetC10_2: C10.2 VD3.1 VD5.2 | length 63.1
  Top Layer w0.3: VD3.1 58.275,6.5 59.475,6.5 60.025,7.05 v1(60.322,7.05)
  Bottom Layer w0.2: VD5.2@8.687,14.837 VD5.2
  Bottom Layer w0.3: VD5.2@8.687,14.837 7.1,13.25 7.1,11.675 9.675,9.1 58.272,9.1 v1(60.322,7.05)
NetDD3_1: DD3.1 L1.1 VD3.2 | length 6.8
  Top Layer w0.3: L1.1 51.625,5.225 52.1,4.75 DD3.1 55.083,5.342 VD3.2
NetDD3_3: DD3.3 R12.2 VD10.1 | length 23.9
  Top Layer w0.3: v1(53.45,2.7) 53.6,2.85 DD3.3 ; VD10.1 62.975,10.334 62.975,3.1 62.625,2.75 R12.2 v1(61.675,1.25) v1@61.45,1.25
  Bottom Layer w0.3: v1(53.45,2.7) 55.15,1 61.3,1 61.55,1.25 v1(61.675,1.25)
NetR7_2: R7.2 VD1.2 | length 1.4
  Top Layer w0.6: R7.2 23.95,4.896 VD1.2
NetR8_2: R8.2 R9.1 | length 13.7
  Top Layer w0.6: v1(47.375,33.275) 47.375,36.05 48.775,37.45 R9.1
  Bottom Layer w0.6: v1(47.375,33.275) 47.4,33.3 R8.2@55.325,33.3
NetR9_2: R9.2 VD2.2 | length 12.8
  Top Layer w0.3: R9.2@52.65,36.325 55.575,39.25 60.5,39.25 62.025,37.725 VD2.2
NetR10_2: R10.2 R11.1 | length 9.2
  Top Layer w0.6: v1(15.35,34.475) 15.725,34.1 19.449,34.1 19.8,34.451 19.8,34.6 20.15,34.95 R11.1
  Bottom Layer w0.6: R10.2@13.825,37.075 14.55,37.075 15.35,36.275 v1(15.35,34.475)
NetR11_2: R11.2 VD4.2 | length 12.4
  Top Layer w0.3: VD4.2 10.975,39.15 15.5,39.15 17.4,37.25 R11.2
NetVD5_1: VD5.1 VD6.2 | length 11.5
  Bottom Layer w0.3: VD5.1 12.447,12.297 14.987,14.837 VD6.2
NetVD6_1: VD6.1 VD7.2 | length 11.5
  Bottom Layer w0.3: VD6.1 22.347,12.297 24.887,14.837 VD7.2
NetVD7_1: VD7.1 VD8.2 | length 11.5
  Bottom Layer w0.3: VD7.1 33.072,12.297 35.612,14.837 VD8.2
NetVD8_1: VD8.1 VD9.2 | length 11.5
  Bottom Layer w0.3: VD8.1 43.622,12.297 46.162,14.837 VD9.2
NetVD9_1: VD9.1 VD10.2 | length 11.5
  Bottom Layer w0.3: VD9.1 54.047,12.297 56.587,14.837 VD10.2
PWM: DD3.4 X1.16 X2.16 | length 50.9
  Top Layer w0.2: v1(37.802,30.977) 37.802,22.452 37.793,22.443 37.793,21.49 37.802,21.481 37.802,7.752 X1.16 37.75,6.9 37.1,6.25 37.1,3.625 38.8,1.925 57.05,1.925 57.733,2.608 DD3.4
  Bottom Layer w0.2: X2.16 37.775,30.925 37.802,30.952 v1(37.802,30.977)
pads on no net: DD1.4 DD1.5 DD2.4 DD2.5 R9.3 R11.3 X1.5 X2.5

## Polygon pours and split planes (outlines as drawn)
GND on Top Layer "Top Layer-No Net" (solid, remove dead copper, pour order 28): 0,42.267 0,0 0.5,0.5 70.013,0.5 70.013,42.267
+3,3В on Top Layer "Top Layer-+3,3В" (solid, pour order 2): 37.364,6.5 40.15,6.5 40.15,4.4 37.39,4.4
+3,3В on Top Layer "Top Layer-+3,3В 1" (solid, pour order 0): 29.675,6.76 32.475,6.76 32.475,4.325 29.675,4.325
GND on Bottom Layer "Bottom Layer-GND" (solid, remove dead copper, pour order 30): 0,44.475 0,0 69.7,0 70.35,0.65 70.225,0.775 70.225,43.5
+3,3В on Bottom Layer "Bottom Layer-+3,3В" (solid, pour order 5): 38.05,30.841 39.8,30.841 39.8,27.909 38.05,27.909
+3,3В on Bottom Layer "Bottom Layer-+3,3В 1" (solid, pour order 4): 30.727,30.9 32.1,30.9 32.1,27.85 30.7,27.85
+3,3В on Bottom Layer "Bottom Layer-+3,3В 2" (solid, pour order 3): 36.16,4.5 39.525,4.5 39.525,6.5 36.16,6.5
+3,3В on Bottom Layer "Bottom Layer-+3,3В 3" (solid, pour order 1): 29.875,6.45 29.875,4.45 32.325,4.45 32.35,6.45

## Keep-outs
Keep-Out Layer:
  lines w0.1: -0.038,2.267 ccw(c2.013,2.267) 2.013,0.216 ; -0.038,2.267 ccw(c2.013,2.267) 2.013,0.216 ; -0.038,2.267 -0.038,40.266 ; -0.038,2.267 -0.038,40.266 ; -0.038,40.267 cw(c2.013,40.267) 2.013,42.317 ; -0.038,40.267 ccw(c0.012,40.267) -0.038,40.266 ; -0.038,40.267 ccw(c0.012,40.267) -0.038,40.266 ; -0.038,40.267 cw(c2.013,40.267) 2.013,42.317 ; -0.038,40.267 ccw(c0.012,40.267) -0.038,40.266 ; -0.038,40.267 ccw(c0.012,40.267) -0.038,40.266 ; -0.038,40.266 -0.038,40.267 ; -0.038,40.266 -0.038,40.267 ; 2.013,0.216 68.013,0.216 ; 2.013,0.216 68.013,0.216 ; 2.013,42.317 ccw(c2.013,42.267) 2.013,42.317 ; 2.013,42.317 ccw(c2.013,42.267) 2.013,42.317 ; 2.013,42.317 ccw(c2.013,42.267) 2.013,42.317 ; 2.013,42.317 ccw(c2.013,42.267) 2.013,42.317 ; 2.013,42.317 2.088,42.317 ; 2.013,42.317 2.088,42.317 ; 2.088,42.317 68.087,42.317 68.013,42.317 ; 68.013,0.216 ccw(c68.013,2.267) 70.063,2.267 ; 68.013,0.216 ccw(c68.013,2.267) 70.063,2.267 ; 68.013,42.317 cw(c68.013,40.267) 70.063,40.267 ; 68.013,42.317 ccw(c68.013,42.267) 68.012,42.317 ; 68.013,42.317 ccw(c68.013,42.267) 68.012,42.317 ; 70.063,2.267 70.063,40.266 ; 70.063,40.266 ccw(c70.013,40.267) 70.063,40.267 ; 70.063,40.266 ccw(c70.013,40.267) 70.063,40.267 ; 70.063,40.266 70.063,40.267

## Other copper
Top Layer:
  pour cut-out: 48.075,33.8 48.175,33.9 50.95,33.9 50.95,34.325 53.85,34.325 53.85,38.475 53.825,38.5 48.55,38.5 48.522,38.472 48.522,36.199 48.081,35.758
  pour cut-out: 21.532,38.075 16.675,38.075 16.65,38.1 16.55,38 16.55,34.6 21.466,34.6
  pour cut-out: 35.825,6.7 35.828,6.697 37.1,6.697 37.1,3.625 36.74,3.265 36.644,3.36 35.8,3.36
Bottom Layer:
  pour cut-out: 19.743,11.736 18.95,10.942 18.95,9.661 20.504,9.661 20.504,11.743
  pour cut-out: 58.04,8.572 58.04,3.489 45.8,3.61 45.8,8.517
  pour cut-out: 58.2,38.075 60.121,38.075 60.121,35.032 60.138,35.015 58.297,35.015

## Silkscreen, mask and mechanical layers (free items; w line width, h text height)
Top Overlay:
  lines w0.2: 26,36.95 25.95,36.95 ; 27.975,36.95 28.05,36.95 28.05,40.025 28.05,40.45 26.975,40.45 ; 29.125,36.95 29.125,40.025 ; 30.125,36.95 30.15,36.95 30.15,40.025 ; 31.15,36.95 31.15,40.025 ; 32.175,36.95 32.175,40.025 ; 32.2,40.025 32.175,40.025 ; 33.175,36.95 33.225,36.95 33.225,40.025 ; 34.25,36.95 34.25,40.025 ; 35.275,36.95 35.275,40.025 ; 36.3,37 36.3,40.025 ; 37.3,36.975 37.3,40.025 ; 39.125,40.45 39.125,40.025 39.125,36.95 38.2,36.95 38.2,40.025 ; 39.2,40.45 38.2,40.45 ; 39.55,40.45 40.1,40.45 40.1,37 41.025,37 41.025,40.45 42.025,40.45 42.025,36.95 ; 41.975,36.95 42.9,36.95 ; 42.925,36.95 42.925,40.45 43.875,40.45 43.875,36.975 ; 43.825,36.975 43.9,36.975 ; 25.95,36.95 25.95,40.025 ; 25.95,36.95 25.95,40.025 ; 25.95,36.95 26.975,36.95 26.975,40.025 ; 25.95,40.025 25.95,40.45 26.975,40.45 ; 25.95,40.025 25.95,40.025 ; 26.975,40.025 26.975,40.45 ; 26.975,40.025 26.975,40.45 ; 29.125,40.025 29.125,40.45 30.15,40.45 ; 29.125,40.025 29.125,40.025 ; 30.15,40.025 30.15,40.45 ; 30.15,40.025 30.15,40.45 ; 30.15,40.45 31.15,40.45 ; 31.15,40.025 31.15,40.45 ; 31.15,40.025 31.15,40.45 ; 31.15,40.45 32.175,40.45 ; 32.175,40.025 32.175,40.45 ; 32.175,40.025 32.175,40.45 ; 32.175,40.45 33.225,40.45 ; 33.225,40.025 33.225,40.45 ; 33.225,40.025 33.225,40.45 ; 33.225,40.45 34.25,40.45 ; 34.25,40.025 34.25,40.45 ; 34.25,40.025 34.25,40.45 ; 34.25,40.45 35.275,40.45 ; 35.275,40.025 35.275,40.45 ; 35.275,40.025 35.275,40.45 ; 35.275,40.45 36.3,40.45 ; 36.3,40.025 36.3,40.45 ; 36.3,40.025 36.3,40.45 ; 36.3,40.45 37.3,40.45 ; 37.3,40.025 37.3,40.45 ; 37.3,40.025 37.3,40.45 ; 37.3,40.45 38.2,40.45 ; 38.2,40.025 38.2,40.45 ; 38.2,40.025 38.2,40.45 ; 24.9,36.95 25.175,36.95 44.675,36.95 44.975,36.95 44.975,40.45 24.9,40.45 24.9,36.95
  text "N/C" at 29.95,38.075 h1 r90
  text "GND" at 44.725,37.975 h1 r90
  text "GND" at 27.85,37.9 h1 r90
  text "GND" at 42.775,37.9 h1 r90
  text "GND" at 25.725,37.875 h1 r90
  text "GND" at 26.775,37.875 h1 r90
  text "GND" at 43.7,37.875 h1 r90
  text "SCL3" at 39.925,37.825 h1 r90
  text "SDA2" at 37.1,37.755 h1 r90
  text "SCL2" at 38.05,37.755 h1 r90
  text "SDA3" at 38.975,37.75 h1 r90
  text "PWM" at 40.875,37.725 h1 r90
  text "+3,3В" at 28.875,37.7 h1 r90
  text "+3,3В" at 41.825,37.7 h1 r90
  text "LIGHT_1" at 30.95,37.325 h1 r90
  text "LIGHT_2" at 31.95,37.325 h1 r90
  text "LIGHT_3" at 33,37.3 h1 r90
  text "LIGHT_4" at 34.05,37.275 h1 r90
  text "LIGHT_5" at 35.05,37.225 h1 r90
  text "LIGHT_6" at 36.075,37.225 h1 r90
  text "0,1мк" at 55,36.125 h1
  text "0,1мк" at 13.25,31.45 h1
  text "LIGHT CONTROL" at 16.475,30.95 h1.4
  text "LIGHT CONTROL" at 48.7,30.9 h1.4
  text "RGB SENSOR" at 6.45,29.425 h1.4
  text "RGB SENSOR" at 59.05,29.4 h1.4
  text "1" at 7.725,16.5 h2.5
  text "2" at 18.15,16.5 h2.5
  text "4" at 39.025,16.5 h2.5
  text "6" at 59.9,16.5 h2.5
  text "3" at 28.525,16.475 h2.5
  text "5" at 49.425,16.475 h2.5
  text "0,22мк" at 57.15,9.15 h1
  text "300" at 23.15,7.675 h1
  text "4,7мк" at 60.75,5.775 h1
  text "10" at 62.925,2.1 h1
  text "+3,3В" at 22.075,1.1 h1.5
Bottom Overlay:
  lines w0.2: 27.625,5.45 27.625,1.975 26.6,1.975 26.6,2.375 ; 28.7,1.95 28.725,1.975 28.725,2.375 28.725,5.45 ; 29.775,1.975 29.775,5.45 ; 30.8,1.975 30.8,5.45 ; 31.8,1.975 31.8,5.45 ; 32.825,2 32.825,5.45 32.85,5.45 ; 33.875,1.975 33.875,5.45 ; 34.9,1.975 34.9,5.45 ; 35.925,1.975 35.925,5.45 ; 36.925,5.45 36.95,5.45 36.95,1.975 ; 37.875,5.45 37.95,5.45 37.95,2 ; 38.825,5.45 38.85,5.45 38.85,1.95 39.775,1.95 39.775,5.45 40.75,5.45 40.75,1.95 41.675,1.95 41.675,5.45 42.625,5.45 ; 42.675,5.45 42.675,1.95 43.675,1.95 43.675,5.45 44.7,5.45 ; 44.65,2 44.65,5.45 ; 26.6,2.375 26.6,5.45 26.6,2.375 ; 25.55,1.95 45.625,1.95 45.625,5.45 25.55,5.45 25.55,1.95
  text "150" at 16.025,36.075 h1
  text "150" at 56.65,31.4 h1
  text "10к" at 42.3,25.625 h1
  text "10к" at 63.1,25.6 h1
  text "10к" at 21.45,25.55 h1
  text "10к" at 52.775,25.525 h1
  text "10к" at 31.825,25.5 h1
  text "10к" at 11.025,25.45 h1
  text "0,1мк" at 55.8,19.075 h1
  text "0,1мк" at 66.25,19.05 h1
  text "0,1мк" at 35.025,19 h1
  text "0,1мк" at 45.35,18.975 h1
  text "0,1мк" at 14.125,18.95 h1
  text "0,1мк" at 24.575,18.95 h1
  text "LIGHT_2" at 32.6,5.225 h1 r90
  text "LIGHT_3" at 33.625,5.175 h1 r90
  text "LIGHT_1" at 31.575,5.15 h1 r90
  text "LIGHT_5" at 35.7,5.15 h1 r90
  text "LIGHT_6" at 36.7,5.15 h1 r90
  text "LIGHT_4" at 34.675,5.125 h1 r90
  text "+3,3В" at 29.55,4.725 h1 r90
  text "+3,3В" at 42.475,4.625 h1 r90
  text "SDA2" at 37.75,4.55 h1 r90
  text "SDA3" at 39.6,4.525 h1 r90
  text "SCL3" at 40.55,4.525 h1 r90
  text "SCL2" at 38.7,4.5 h1 r90
  text "PWM" at 41.55,4.5 h1 r90
  text "GND" at 28.45,4.475 h1 r90
  text "GND" at 26.45,4.45 h1 r90
  text "GND" at 27.45,4.45 h1 r90
  text "GND" at 45.45,4.45 h1 r90
  text "GND" at 43.5,4.4 h1 r90
  text "GND" at 44.475,4.375 h1 r90
  text "N/C" at 30.625,4.25 h1 r90
Mechanical 1:
  circle w0.025: c3.513,8.517 r1.6
  circle w0.025: c3.513,27.017 r1.6
  circle w0.025: c40.213,21.967 r3.5
  circle w0.025: c40.213,13.567 r3.5
  circle w0.025: c66.513,8.517 r1.6
  circle w0.025: c61.013,21.967 r3.5
  circle w0.025: c50.613,21.967 r3.5
  circle w0.025: c19.413,21.967 r3.5
  circle w0.025: c9.013,21.967 r3.5
  circle w0.025: c66.513,27.017 r1.6
  circle w0.025: c61.013,13.567 r3.5
  circle w0.025: c50.613,13.567 r3.5
  circle w0.025: c19.413,13.567 r3.5
  circle w0.025: c9.013,13.567 r3.5
  circle w0.025: c29.813,21.967 r3.5
  circle w0.025: c29.813,13.567 r3.5
  lines w0.025: 7.013,33.267 9.013,33.267 9.013,36.267 7.013,36.267 7.013,33.267 ; 9.313,33.567 11.313,33.567 11.313,35.967 9.313,35.967 9.313,33.567 ; 15.012,32.267 ccw(c17.013,32.267) 17.013,30.267 53.013,30.267 ccw(c53.013,32.267) 55.013,32.267 55.013,40.267 15.013,40.267 15.013,32.267 ; 30.163,7.317 30.163,8.117 30.363,8.117 30.363,7.317 30.163,7.317 ; 30.163,28.817 30.363,28.817 30.363,29.567 30.163,29.567 30.163,28.817 ; 39.663,7.467 39.663,8.117 39.863,8.117 39.863,7.467 39.663,7.467 ; 39.663,28.817 39.863,28.817 39.863,29.567 39.663,29.567 39.663,28.817 ; 58.713,33.567 60.713,33.567 60.713,35.967 58.713,35.967 58.713,33.567 ; 61.013,33.267 63.013,33.267 63.013,36.267 61.013,36.267 61.013,33.267

## Text inside footprints (layer, text, board x,y; h text height)
DD1: Mechanical 9 "1,5к" at 58.95,33.9 h1.52
DD2: Mechanical 9 "1,5к" at 11.075,35.625 h1.52 r180